# Altium PCB SFCmasterD.PcbDoc (part 5 of 7)
Units mm, origin at the board's own origin, x right, y up, seen from the top; angles counter-clockwise.
Board outline 152.4 x 101.6 mm, 2 copper layers (Top Layer, Bottom Layer); 249 components, 250 nets, 987 pads, 265 vias.
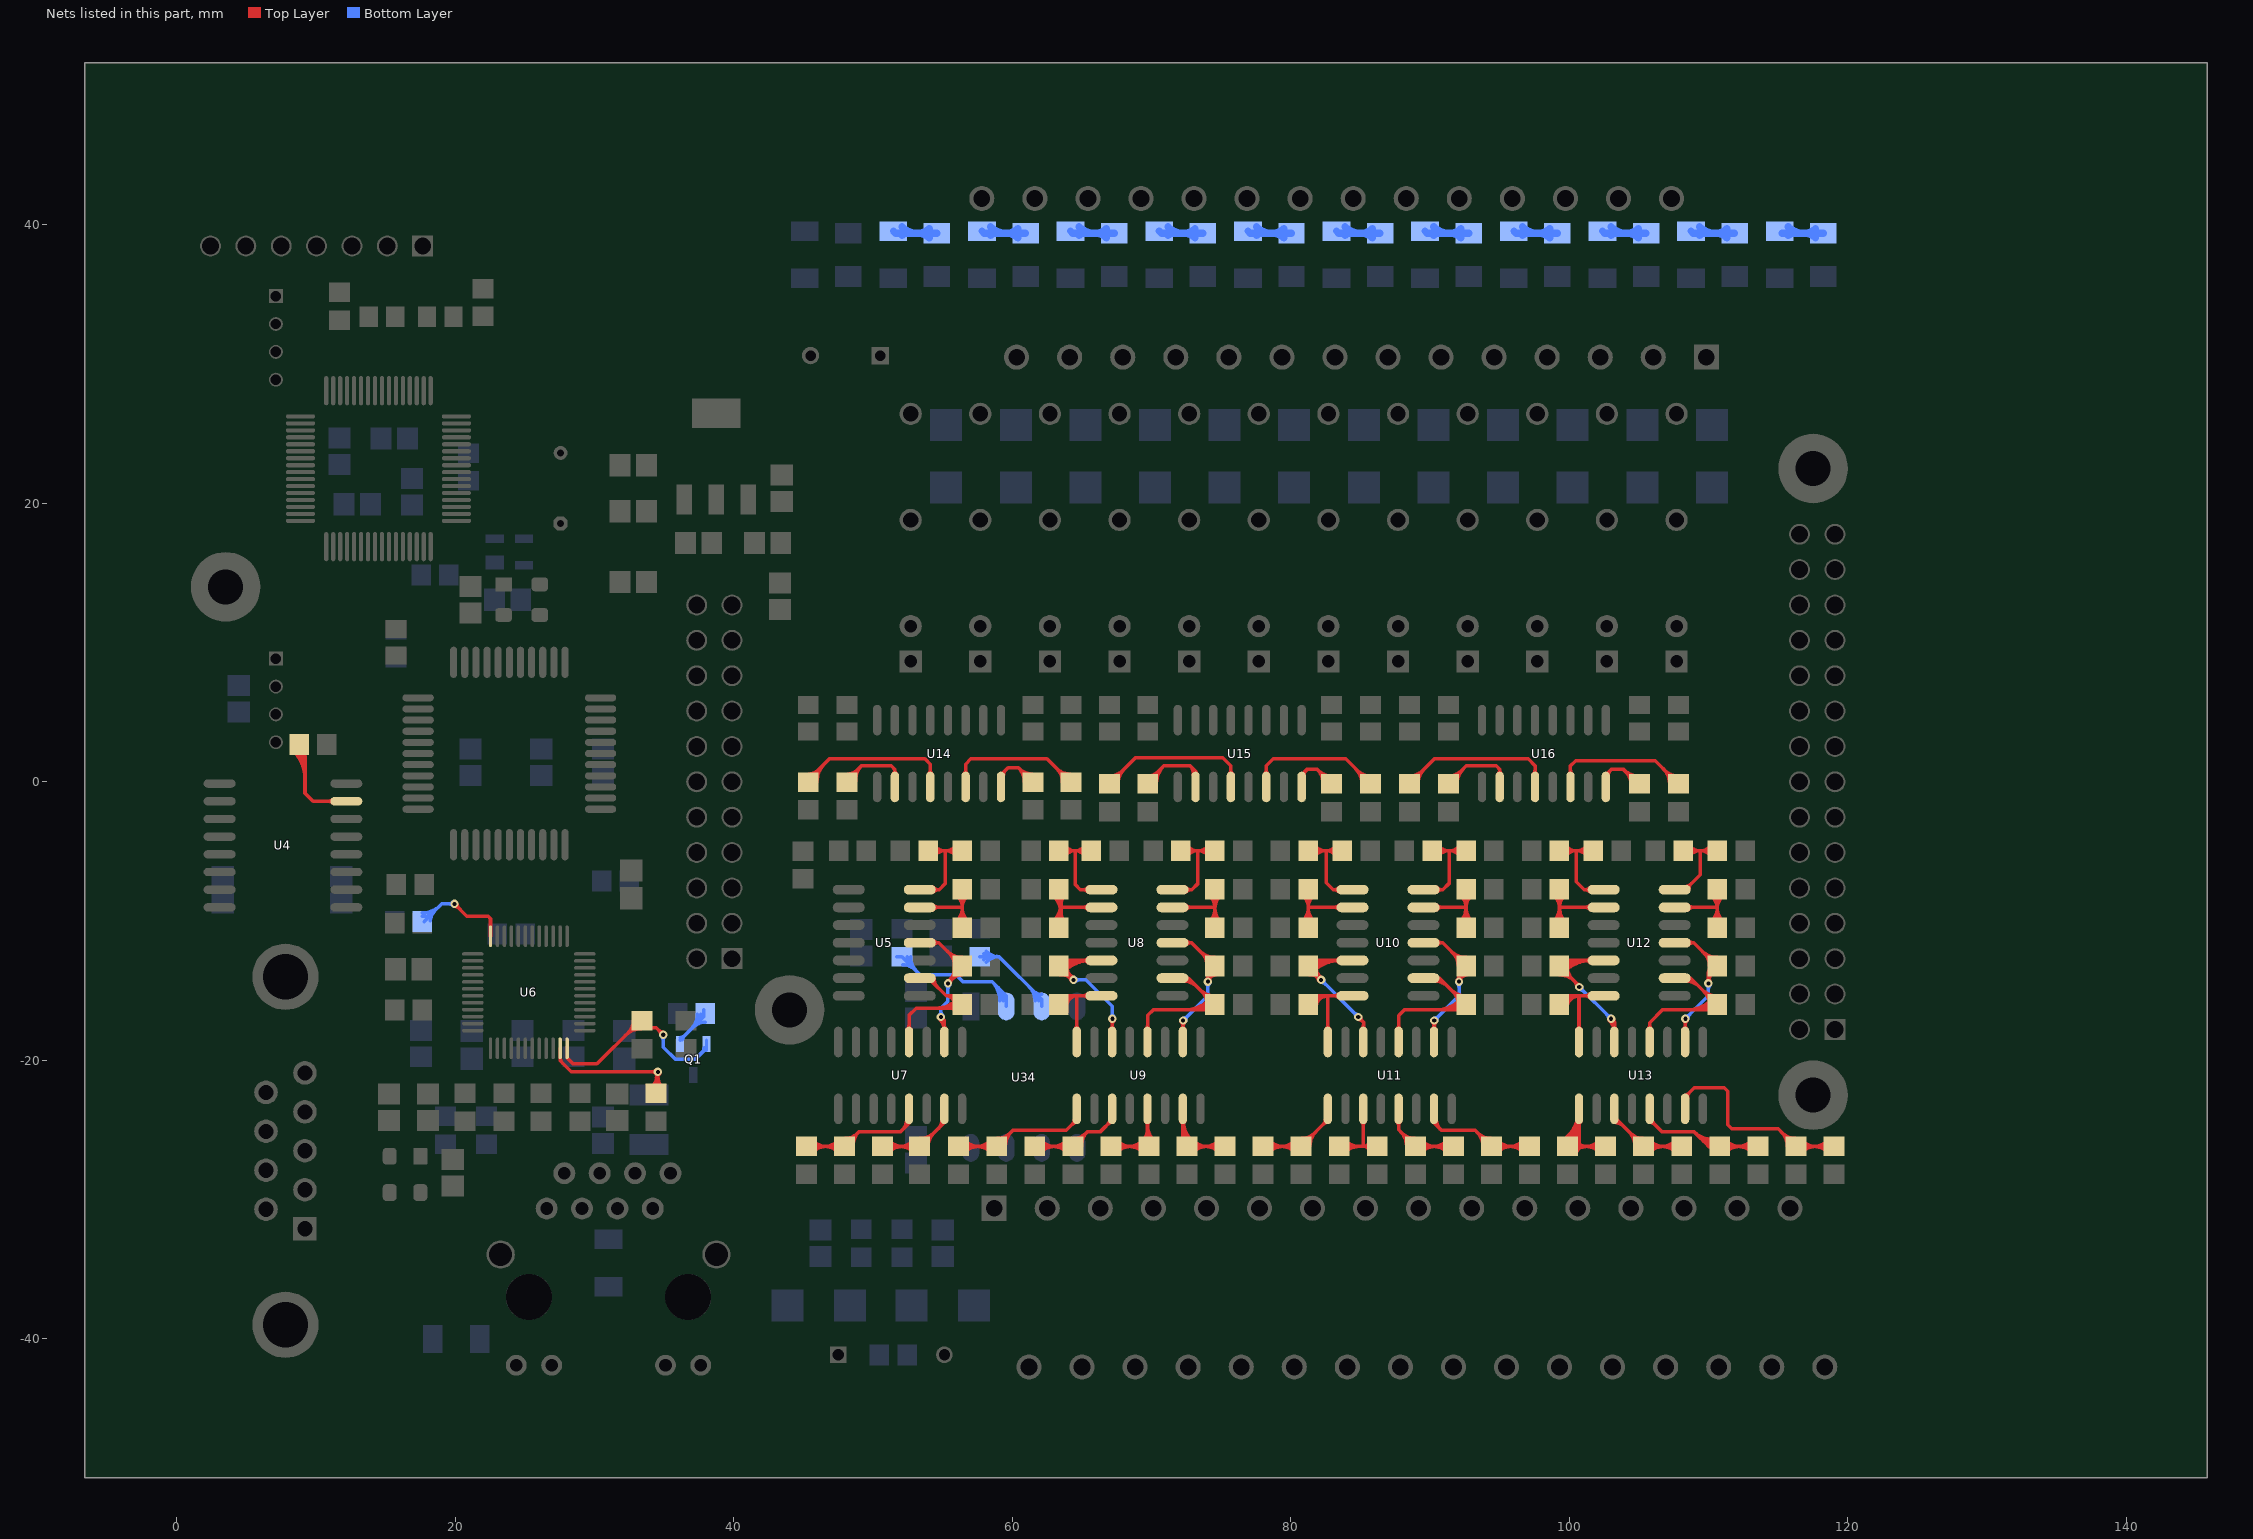
[diagram p5: the nets of this part, all layers, seen from the top]

## Via types
v1: diameter 0.6, hole 0.3, Top Layer to Bottom Layer, 265 vias

## Nets (pads, with @x,y where several pads share a name; then routed paths per layer and width w, separated by ;. In a path a pad name is that pad's centre, name@x,y a point inside that pad or via, vN(x,y) a via of type N, cw(c..) or ccw(c..) an arc to the next point about the centre after c; other vN are vias at no path point) (continued)
NetLR5_2: LR5.2 R113.1 | length 6.8
  Bottom Layer w0.508: LR5.2@51.45,39.546 51.6,39.396 R113.1@54.583,39.396 ; LR5.2@52.066,39.231 cw(c52.465,38.831) 52.465,39.396 ; LR5.2@52.066,39.861 ccw(c53.189,40.985) 53.189,39.396 ; R113.1@54.032,39.045 ccw(c53.186,38.199) 53.186,39.396 ccw(c53.186,40.593) R113.1@54.032,39.747
NetLR6_2: LR6.2 R119.1 | length 6.8
  Bottom Layer w0.508: LR6.2@57.816,39.546 57.966,39.396 R119.1@60.948,39.396 ; LR6.2@58.431,39.231 cw(c58.83,38.831) 58.83,39.396 ; LR6.2@58.431,39.861 ccw(c59.555,40.985) 59.555,39.396 ; R119.1@60.398,39.045 ccw(c59.551,38.199) 59.551,39.396 ccw(c59.551,40.593) R119.1@60.398,39.747
NetLR7_2: LR7.2 R125.1 | length 6.8
  Bottom Layer w0.508: LR7.2@64.181,39.546 64.331,39.396 R125.1@67.314,39.396 ; LR7.2@64.797,39.231 cw(c65.196,38.831) 65.196,39.396 ; LR7.2@64.797,39.861 ccw(c65.92,40.985) 65.92,39.396 ; R125.1@66.763,39.045 ccw(c65.916,38.199) 65.916,39.396 ccw(c65.916,40.593) R125.1@66.763,39.747
NetLR8_2: LR8.2 R131.1 | length 6.8
  Bottom Layer w0.508: LR8.2@70.547,39.546 70.697,39.396 R131.1@73.679,39.396 ; LR8.2@71.162,39.231 cw(c71.561,38.831) 71.561,39.396 ; LR8.2@71.162,39.861 ccw(c72.285,40.985) 72.285,39.396 ; R131.1@73.129,39.045 ccw(c72.282,38.199) 72.282,39.396 ccw(c72.282,40.593) R131.1@73.129,39.747
NetLR9_2: LR9.2 R137.1 | length 6.8
  Bottom Layer w0.508: LR9.2@76.912,39.546 77.062,39.396 R137.1@80.045,39.396 ; LR9.2@77.527,39.231 cw(c77.927,38.831) 77.927,39.396 ; LR9.2@77.527,39.861 ccw(c78.651,40.985) 78.651,39.396 ; R137.1@79.494,39.045 ccw(c78.647,38.199) 78.647,39.396 ccw(c78.647,40.593) R137.1@79.494,39.747
NetLR10_2: LR10.2 R143.1 | length 6.8
  Bottom Layer w0.508: LR10.2@83.277,39.546 83.427,39.396 R143.1@86.41,39.396 ; LR10.2@83.893,39.231 cw(c84.292,38.831) 84.292,39.396 ; LR10.2@83.893,39.861 ccw(c85.016,40.985) 85.016,39.396 ; R143.1@85.859,39.045 ccw(c85.013,38.199) 85.013,39.396 ccw(c85.013,40.593) R143.1@85.859,39.747
NetLR11_2: LR11.2 R149.1 | length 6.8
  Bottom Layer w0.508: LR11.2@89.643,39.546 89.793,39.396 R149.1@92.775,39.396 ; LR11.2@90.258,39.231 cw(c90.657,38.831) 90.657,39.396 ; LR11.2@90.258,39.861 ccw(c91.382,40.985) 91.382,39.396 ; R149.1@92.225,39.045 ccw(c91.378,38.199) 91.378,39.396 ccw(c91.378,40.593) R149.1@92.225,39.747
NetLR12_2: LR12.2 R155.1 | length 6.8
  Bottom Layer w0.508: LR12.2@96.008,39.546 96.158,39.396 R155.1@99.141,39.396 ; LR12.2@96.623,39.231 cw(c97.023,38.831) 97.023,39.396 ; LR12.2@96.623,39.861 ccw(c97.747,40.985) 97.747,39.396 ; R155.1@98.59,39.045 ccw(c97.743,38.199) 97.743,39.396 ccw(c97.743,40.593) R155.1@98.59,39.747
NetLR13_2: LR13.2 R161.1 | length 6.8
  Bottom Layer w0.508: LR13.2@102.373,39.546 102.523,39.396 R161.1@105.506,39.396 ; LR13.2@102.989,39.231 cw(c103.388,38.831) 103.388,39.396 ; LR13.2@102.989,39.861 ccw(c104.112,40.985) 104.112,39.396 ; R161.1@104.955,39.045 ccw(c104.109,38.199) 104.109,39.396 ccw(c104.109,40.593) R161.1@104.955,39.747
NetLR14_2: LR14.2 R167.1 | length 6.8
  Bottom Layer w0.508: LR14.2@108.739,39.546 108.889,39.396 R167.1@111.872,39.396 ; LR14.2@109.354,39.231 cw(c109.753,38.831) 109.753,39.396 ; LR14.2@109.354,39.861 ccw(c110.478,40.985) 110.478,39.396 ; R167.1@111.321,39.045 ccw(c110.474,38.199) 110.474,39.396 ccw(c110.474,40.593) R167.1@111.321,39.747
NetLR15_2: LR15.2 R173.1 | length 6.6
  Bottom Layer w0.508: LR15.2@115.254,39.396 R173.1@118.237,39.396 ; LR15.2@115.72,39.231 cw(c116.119,38.831) 116.119,39.396 ; LR15.2@115.72,39.861 ccw(c116.843,40.985) 116.843,39.396 ; R173.1@117.686,39.045 ccw(c116.84,38.199) 116.84,39.396 ccw(c116.84,40.593) R173.1@117.686,39.747
NetQ1_1: Q1.1 R106.2 | length 6.4
  Bottom Layer w0.25: Q1.1@36.134,-18.56 37.83,-16.864 R106.2@37.83,-16.383 ; Q1.1@36.134,-18.364 ccw(c36.134,-17.891) 36.469,-18.225 ; Q1.1@36.309,-18.539 cw(c36.681,-18.539) Q1.1@36.418,-18.276 ; 36.94,-17.754 ccw(c35.873,-16.687) R106.2@37.382,-16.687 ; 37.061,-17.633 cw(c37.957,-18.529) R106.2@37.957,-17.262 ; R106.2@37.367,-17.327 ccw(c36.727,-16.687) R106.2@37.632,-16.687
NetQ1_2: Q1.2 R100.2 U6.12 | length 19.3
  Top Layer w0.25: U6.12@28.023,-19.138 28.023,-19.83 28.444,-20.251 30.168,-20.251 32.766,-17.653 34.417,-17.653 v1(34.925,-18.161) ; 32.211,-18.208 cw(c33.351,-19.349) R100.2@33.351,-17.736 ; 32.435,-17.984 ccw(c31.612,-17.161) R100.2@32.776,-17.161 ; 32.637,-17.782 cw(c33.351,-18.495) R100.2@33.351,-17.486 ; v1@34.75,-18.161 ccw(c34.328,-18.161) 34.626,-17.862 ccw(c34.925,-17.564) v1@34.925,-17.986
  Bottom Layer w0.25: v1@34.801,-18.285 cw(c34.503,-18.583) 34.925,-18.583 cw(c35.347,-18.583) v1@35.049,-18.285 ; v1(34.925,-18.161) 34.925,-19.05 35.814,-19.939 37.211,-19.939 38.034,-19.116 Q1.2@38.034,-18.56 ; 37.716,-19.434 ccw(c37.371,-19.089) Q1.2@37.859,-19.089 ; Q1.2@37.781,-19.369 cw(c38.034,-19.621) Q1.2@38.034,-19.264
NetR6_2: R6.2 U4.7 | length 13.4
  Top Layer w0.254: R6.2@8.374,2.212 cw(c6.374,0.212) 9.202,0.212 ; R6.2@8.553,2.391 cw(c6.988,0.826) 9.202,0.826 ; R6.2@8.636,2.413 9.202,1.847 ; R6.2@8.733,2.571 cw(c7.601,1.439) 9.202,1.439 ; R6.2@8.779,2.044 cw(c8.779,1.498) 9.165,1.884 ; R6.2@9.196,2.224 ccw(c9.394,2.039) 9.202,1.847 ; U4.7@11.198,-1.519 ccw(c10.902,-1.815) 10.902,-1.397 ccw(c10.902,-0.979) U4.7@11.198,-1.275 ; U4.7@12.17,-1.397 9.779,-1.397 9.202,-0.82 9.202,1.847
NetR11_2: R11.2 U5.9 U7.12 | length 17.4
  Top Layer w0.254: U7.12@52.456,-17.76 ccw(c52.16,-17.464) 52.578,-17.464 ccw(c52.996,-17.464) U7.12@52.7,-17.76 ; U7.12@52.578,-18.682 52.578,-16.764 53.086,-16.256 56.15,-16.256 R11.2@56.404,-16.002 55.769,-15.367 55.245,-15.367 ; U5.9@53.35,-14.097 53.975,-14.097 55.245,-15.367 ; U5.9@54.373,-14.097 ccw(c55.334,-14.097) 54.654,-14.776 ; 54.528,-16.256 ccw(c54.528,-14.176) R11.2@55.999,-15.647 ; 55.141,-16.256 ccw(c55.141,-14.789) R11.2@56.178,-15.826 ; 55.499,-15.367 cw(c55.499,-15.953) R11.2@56.085,-15.952 ; 55.513,-16.256 cw(c55.513,-16.943) R11.2@55.999,-16.457 ; R11.2@55.753,-15.367 cw(c55.753,-15.953) R11.2@56.339,-15.952 ; R11.2@55.831,-15.952 ccw(c55.245,-15.953) 55.245,-15.367
NetR12_1: R12.1 R14.2 U5.14 | length 11.2
  Top Layer w0.254: U5.14@53.35,-7.747 54.737,-7.747 55.181,-7.302 55.181,-4.953 ; R12.1@53.959,-4.953 55.181,-4.953 ; U5.14@54.308,-7.905 cw(c54.688,-8.285) 54.688,-7.747 cw(c54.688,-7.209) U5.14@54.308,-7.589 ; R12.1@54.399,-5.32 cw(c55.181,-5.97) 55.181,-4.953 ; R12.1@54.399,-4.586 ccw(c55.181,-3.936) 55.181,-4.953 ; R14.2@55.964,-5.32 ccw(c55.182,-5.97) 55.182,-4.953 ; R14.2@55.964,-4.586 cw(c55.182,-3.936) 55.182,-4.953 ; R14.2@56.404,-4.953 55.181,-4.953
NetR13_1: R13.1 R22.2 U7.5 | length 19.4
  Top Layer w0.254: R22.2@45.212,-26.178 R13.1@47.945,-26.178 48.977,-25.146 ; R22.2@45.488,-26.404 cw(c46.032,-26.948) 46.032,-26.178 cw(c46.032,-25.408) R22.2@45.488,-25.952 ; R22.2@45.667,-26.583 cw(c46.645,-27.561) 46.645,-26.178 cw(c46.645,-24.795) R22.2@45.667,-25.773 ; R13.1@47.49,-26.583 ccw(c46.512,-27.561) 46.512,-26.178 ccw(c46.512,-24.795) R13.1@47.49,-25.773 ; R13.1@47.669,-26.404 ccw(c47.125,-26.948) 47.125,-26.178 ccw(c47.125,-25.408) R13.1@47.669,-25.952 ; R13.1@47.995,-25.605 ccw(c47.995,-24.342) 48.888,-25.235 ; R13.1@48.314,-26.171 cw(c49.143,-26.153) R13.1@48.556,-25.566 ; R13.1@48.568,-26.165 cw(c49.965,-26.134) 48.977,-25.146 ; 52.121,-24.968 ccw(c51.434,-24.282) U7.5@52.405,-24.282 ; U7.5@52.578,-23.482 52.578,-24.511 51.943,-25.146 48.977,-25.146
NetR16_2: R16.2 U6.11 | length 15.4
  Top Layer w0.25: U6.11@27.523,-19.788 ccw(c28.107,-19.788) 27.694,-20.201 ; U6.11@27.523,-19.138 27.523,-20.03 28.321,-20.828 v1(34.544,-20.828) ; R16.2@34.067,-21.955 ccw(c32.975,-20.828) v1(34.544,-20.828) ; R16.2@34.241,-22.135 ccw(c33.547,-21.419) 34.544,-21.419 ; v1@34.392,-20.916 cw(c34.026,-21.127) 34.435,-21.236 ; R16.2@34.417,-22.241 34.179,-22.241 34.544,-21.876 v1(34.544,-20.828) ; v1@34.42,-20.704 cw(c34.122,-20.406) 34.122,-20.828 cw(c34.122,-21.25) 34.42,-20.952 cw(c34.122,-21.25) 34.544,-21.25 cw(c34.966,-21.25) v1@34.668,-20.952 ; 34.435,-21.236 cw(c34.843,-21.345) v1@34.631,-20.98 ; 34.544,-21.166 ccw(c35.669,-21.166) R16.2@34.874,-21.961
NetR23_2: R23.2 U5.11 U7.10 | length 21.9
  Top Layer w0.254: U5.11@53.35,-11.557 54.721,-11.557 R23.2@56.404,-13.24 55.88,-13.764 55.88,-13.97 v1(55.372,-14.478) ccw(c54.261,-13.367) R23.2@55.831,-13.31 ; U5.11@54.308,-11.715 cw(c54.688,-12.095) 54.688,-11.557 cw(c54.688,-11.019) U5.11@54.308,-11.399 ; v1@54.742,-17.013 cw(c53.833,-17.922) U7.10@55.118,-17.922 ; v1(54.864,-16.891) 55.118,-17.145 ; v1@54.883,-17.063 cw(c54.915,-17.347) 55.118,-17.145 ; v1@54.921,-16.834 cw(c54.446,-17.309) 55.118,-17.309 ; U7.10@54.996,-17.76 ccw(c54.7,-17.464) 55.118,-17.464 ccw(c55.536,-17.464) U7.10@55.24,-17.76 ; v1@55.036,-16.91 ccw(c55.32,-16.942) 55.118,-17.145 ; U7.10@55.118,-18.682 55.118,-17.145 ; v1@55.327,-14.311 ccw(c55.219,-13.907) 55.581,-14.116 ccw(c55.942,-14.325) v1@55.539,-14.433 ; 55.34,-12.176 ccw(c56.404,-11.113) R23.2@56.404,-12.617 ; v1@55.372,-14.305 ccw(c55.372,-13.887) 55.667,-14.183 ccw(c55.963,-14.478) v1@55.545,-14.478 ; 55.461,-12.297 cw(c54.568,-13.19) R23.2@55.831,-13.19 ; 55.693,-14.157 cw(c56.404,-14.869) R23.2@56.404,-13.863 ; R23.2@55.774,-12.61 ccw(c56.404,-11.98) R23.2@56.404,-12.871 ; 55.785,-14.065 ccw(c55.057,-13.338) R23.2@56.085,-13.301
  Bottom Layer w0.254: v1@54.742,-16.769 ccw(c54.446,-16.473) 54.864,-16.473 ccw(c55.282,-16.473) v1@54.986,-16.769 ; v1(54.864,-16.891) 54.864,-16.256 55.372,-15.748 v1(55.372,-14.478) ; v1@55.25,-14.6 cw(c54.954,-14.896) 55.372,-14.896 cw(c55.79,-14.896) v1@55.494,-14.6
NetR24_1: R24.1 R26.1 U5.13 | length 11.9
  Top Layer w0.254: U5.13@53.35,-9.017 56.404,-9.017 ; U5.13@54.308,-9.175 cw(c54.688,-9.555) 54.688,-9.017 cw(c54.688,-8.479) U5.13@54.308,-8.859 ; R24.1@55.999,-10.022 ccw(c55.021,-9.044) 56.404,-9.044 ccw(c57.787,-9.044) R24.1@56.809,-10.022 ; R26.1@56.03,-8.199 cw(c55.323,-9.017) 56.404,-9.017 ; R24.1@56.178,-10.202 ccw(c55.634,-9.657) 56.404,-9.657 ccw(c57.174,-9.657) R24.1@56.63,-10.202 ; R24.1@56.404,-10.477 56.404,-9.017 ; R26.1@56.404,-7.715 56.404,-9.017 ; R26.1@56.778,-8.199 ccw(c57.485,-9.017) 56.404,-9.017
NetR25_1: R25.1 R27.2 U7.7 | length 17
  Top Layer w0.254: R27.2@50.678,-26.178 53.411,-26.178 55.118,-24.471 U7.7@55.118,-23.482 ; R27.2@50.953,-26.404 cw(c51.498,-26.948) 51.498,-26.178 cw(c51.498,-25.408) R27.2@50.953,-25.952 ; R27.2@51.133,-26.583 cw(c52.111,-27.561) 52.111,-26.178 cw(c52.111,-24.795) R27.2@51.133,-25.773 ; R25.1@52.885,-26.583 ccw(c51.907,-27.561) 51.907,-26.178 ccw(c51.907,-24.795) R25.1@52.885,-25.773 ; R25.1@53.064,-26.404 ccw(c52.52,-26.948) 52.52,-26.178 ccw(c52.52,-25.408) R25.1@53.064,-25.952 ; R25.1@53.39,-25.859 ccw(c53.39,-25.039) R25.1@53.97,-25.619 ; R25.1@53.39,-25.605 ccw(c53.39,-24.172) 54.403,-25.185 ; R25.1@53.709,-26.178 cw(c54.43,-26.178) R25.1@53.92,-25.669 ; R25.1@53.963,-26.178 cw(c55.297,-26.178) 54.354,-25.235 ; 54.689,-24.899 ccw(c54.072,-24.282) U7.7@54.945,-24.282
NetR28_2: R28.2 U8.7 U9.16 | length 12.3
  Top Layer w0.254: R28.2@63.153,-15.93 cw(c63.786,-16.004) R28.2@63.786,-15.367 ; R28.2@63.214,-16.002 63.849,-15.367 64.643,-15.367 ; R28.2@63.406,-15.96 cw(c64.072,-16.038) 64.072,-15.367 ; R28.2@63.658,-15.989 cw(c64.357,-16.071) 64.357,-15.367 ; R28.2@63.91,-16.019 cw(c64.643,-16.105) 64.643,-15.367 ; U9.16@64.5,-17.76 ccw(c64.205,-17.464) 64.623,-17.464 ccw(c65.04,-17.464) U9.16@64.745,-17.76 ; U9.16@64.623,-18.682 64.623,-15.387 64.643,-15.367 ; U8.7@65.437,-15.525 ccw(c65.057,-15.905) 65.057,-15.367 ccw(c65.057,-14.829) U8.7@65.437,-15.209 ; U8.7@66.395,-15.367 64.643,-15.367
NetR29_1: R29.1 R31.2 U8.1 | length 10.9
  Top Layer w0.254: R29.1@63.341,-4.953 64.5,-4.953 ; R29.1@63.796,-5.301 cw(c64.5,-5.839) 64.5,-4.953 ; R29.1@63.796,-4.605 ccw(c64.5,-4.067) 64.5,-4.953 ; R31.2@65.204,-5.301 ccw(c64.5,-5.839) 64.5,-4.953 ; R31.2@65.204,-4.605 cw(c64.5,-4.067) 64.5,-4.953 ; U8.1@65.437,-7.905 ccw(c65.057,-8.285) 65.057,-7.747 ccw(c65.057,-7.209) U8.1@65.437,-7.589 ; R31.2@65.659,-4.953 64.5,-4.953 ; U8.1@66.395,-7.747 64.881,-7.747 64.5,-7.366 64.5,-4.953
NetR30_1: R30.1 R32.2 U9.1 | length 20.4
  Top Layer w0.254: R32.2@56.143,-26.178 R30.1@58.876,-26.178 60.035,-25.019 63.881,-25.019 64.623,-24.277 U9.1@64.623,-23.482 ; R32.2@56.419,-26.404 cw(c56.964,-26.948) 56.964,-26.178 cw(c56.964,-25.408) R32.2@56.419,-25.952 ; R32.2@56.599,-26.583 cw(c57.577,-27.561) 57.577,-26.178 cw(c57.577,-24.795) R32.2@56.599,-25.773 ; R30.1@58.421,-26.583 ccw(c57.443,-27.561) 57.443,-26.178 ccw(c57.443,-24.795) R30.1@58.421,-25.773 ; R30.1@58.601,-26.404 ccw(c58.056,-26.948) 58.056,-26.178 ccw(c58.056,-25.408) R30.1@58.601,-25.952 ; R30.1@58.926,-25.605 ccw(c58.926,-24.342) 59.819,-25.235 ; R30.1@59.245,-26.178 cw(c60.136,-26.178) R30.1@59.506,-25.548 ; R30.1@59.499,-26.178 cw(c61.003,-26.178) 59.94,-25.114 ; 64.319,-24.581 cw(c64.623,-24.884) U9.1@64.623,-24.455 ; 64.33,-24.57 ccw(c64.043,-24.282) U9.1@64.45,-24.282
NetR33_2: R33.2 U8.5 U9.14 | length 23.5
  Top Layer w0.254: R33.2@63.369,-13.608 cw(c63.438,-14.404) R33.2@64.004,-13.839 ; R33.2@63.387,-13.236 cw(c64.374,-14.222) 64.374,-12.827 ; R33.2@63.391,-13.861 cw(c63.5,-15.113) v1(64.389,-14.224) 63.373,-13.208 63.373,-13.081 63.627,-12.827 U8.5@66.395,-12.827 ; R33.2@63.567,-13.415 cw(c64.987,-14.836) 64.987,-12.827 ; R33.2@63.746,-13.595 cw(c65.6,-15.449) U8.5@65.6,-12.827 ; R33.2@63.914,-13.29 ccw(c65.023,-13.29) v1@64.239,-14.074 ; 64.066,-13.775 ccw(c64.59,-13.472) v1@64.434,-14.057 ; v1@64.216,-14.224 ccw(c63.798,-14.224) 64.094,-13.929 ccw(c64.389,-13.633) v1@64.389,-14.051 ; v1@64.222,-14.269 ccw(c63.818,-14.377) 64.027,-14.015 ccw(c64.236,-13.654) v1@64.344,-14.057 ; U8.5@65.437,-12.985 ccw(c65.057,-13.365) 65.057,-12.827 ccw(c65.057,-12.289) U8.5@65.437,-12.669 ; U9.14@67.04,-17.76 ccw(c66.695,-17.415) 67.183,-17.415 ; v1@67.061,-17.14 cw(c66.765,-17.436) 67.183,-17.436 cw(c67.601,-17.436) v1@67.305,-17.14 ; U9.14@67.163,-18.682 67.183,-18.662 v1(67.183,-17.018) ; 67.183,-17.514 ccw(c67.531,-17.514) U9.14@67.285,-17.76
  Bottom Layer w0.254: v1(64.389,-14.224) 65.278,-14.224 67.183,-16.129 v1(67.183,-17.018) ; v1@64.511,-14.346 cw(c64.807,-14.642) 64.807,-14.224 cw(c64.807,-13.806) v1@64.511,-14.102 ; v1@67.061,-16.896 ccw(c66.765,-16.6) 67.183,-16.6 ccw(c67.601,-16.6) v1@67.305,-16.896
NetR34_1: R34.1 R36.1 U8.2 | length 13
  Top Layer w0.254: R36.1@62.936,-10.022 ccw(c61.574,-8.66) 63.5,-8.66 ; R34.1@62.936,-8.17 cw(c61.574,-9.532) 63.5,-9.532 ; R36.1@63.115,-10.202 ccw(c62.187,-9.274) 63.5,-9.274 ; R34.1@63.115,-7.991 cw(c62.187,-8.919) 63.5,-8.919 ; R36.1@63.341,-10.477 63.5,-10.319 63.5,-7.874 R34.1@63.341,-7.715 ; 63.5,-9.428 ccw(c64.34,-9.428) R36.1@63.746,-10.022 ; 63.5,-9.017 U8.2@66.395,-9.017 ; 63.5,-8.765 cw(c64.34,-8.765) R34.1@63.746,-8.17 ; U8.2@65.437,-9.175 ccw(c65.057,-9.555) 65.057,-9.017 ccw(c65.057,-8.479) U8.2@65.437,-8.859
NetR35_1: R35.1 R37.2 U9.3 | length 17.3
  Top Layer w0.254: R37.2@61.609,-26.178 R35.1@64.342,-26.178 65.374,-25.146 66.294,-25.146 67.163,-24.277 U9.3@67.163,-23.482 ; R37.2@61.885,-26.404 cw(c62.429,-26.948) 62.429,-26.178 cw(c62.429,-25.408) R37.2@61.885,-25.952 ; R37.2@62.064,-26.583 cw(c63.042,-27.561) 63.042,-26.178 cw(c63.042,-24.795) R37.2@62.064,-25.773 ; R35.1@63.887,-26.583 ccw(c62.909,-27.561) 62.909,-26.178 ccw(c62.909,-24.795) R35.1@63.887,-25.773 ; R35.1@64.066,-26.404 ccw(c63.522,-26.948) 63.522,-26.178 ccw(c63.522,-25.408) R35.1@64.066,-25.952 ; R35.1@64.392,-25.605 ccw(c64.392,-24.342) 65.285,-25.235 ; R35.1@64.711,-26.171 cw(c65.54,-26.153) R35.1@64.953,-25.566 ; R35.1@64.965,-26.165 cw(c66.362,-26.134) 65.374,-25.146 ; 66.859,-24.581 cw(c67.163,-24.884) U9.3@67.163,-24.455 ; 66.87,-24.57 ccw(c66.583,-24.282) U9.3@66.99,-24.282
NetR38_2: R38.2 U8.9 U9.12 | length 20.6
  Top Layer w0.254: U9.12@69.58,-17.76 ccw(c69.235,-17.415) 69.723,-17.415 ; U9.12@69.703,-18.682 69.723,-18.662 69.723,-16.764 70.104,-16.383 74.168,-16.383 R38.2@74.549,-16.002 72.644,-14.097 U8.9@71.495,-14.097 ; 69.723,-17.514 ccw(c70.071,-17.514) U9.12@69.825,-17.76 ; U8.9@72.295,-14.32 cw(c72.295,-15.701) 73.271,-14.724 ; U8.9@72.295,-14.066 cw(c72.295,-14.834) 72.838,-14.291 ; 72.367,-16.383 ccw(c72.367,-13.87) R38.2@74.144,-15.647 ; 72.98,-16.383 ccw(c72.98,-14.483) R38.2@74.323,-15.826 ; 73.485,-14.938 ccw(c74.549,-13.875) R38.2@74.549,-15.379 ; 73.593,-16.383 ccw(c73.593,-15.096) R38.2@74.503,-16.006 ; 73.606,-15.059 cw(c72.713,-15.952) R38.2@73.976,-15.952 ; R38.2@73.919,-15.372 ccw(c74.549,-14.742) R38.2@74.549,-15.633
NetR39_1: R39.1 R41.2 U8.14 | length 11.2
  Top Layer w0.254: U8.14@71.495,-7.747 72.882,-7.747 73.327,-7.302 73.327,-4.953 ; R39.1@72.104,-4.953 73.327,-4.953 ; U8.14@72.453,-7.905 cw(c72.833,-8.285) 72.833,-7.747 cw(c72.833,-7.209) U8.14@72.453,-7.589 ; R39.1@72.544,-5.32 cw(c73.326,-5.97) 73.326,-4.953 ; R39.1@72.544,-4.586 ccw(c73.326,-3.936) 73.326,-4.953 ; R41.2@74.109,-5.32 ccw(c73.327,-5.97) 73.327,-4.953 ; R41.2@74.109,-4.586 cw(c73.327,-3.936) 73.327,-4.953 ; R41.2@74.549,-4.953 73.327,-4.953
NetR40_1: R40.1 R42.2 U9.5 | length 15.8
  Top Layer w0.254: R42.2@67.075,-26.178 R40.1@69.808,-26.178 69.703,-26.073 U9.5@69.703,-23.482 ; R42.2@67.35,-26.404 cw(c67.895,-26.948) 67.895,-26.178 cw(c67.895,-25.408) R42.2@67.35,-25.952 ; R42.2@67.53,-26.583 cw(c68.508,-27.561) 68.508,-26.178 cw(c68.508,-24.795) R42.2@67.53,-25.773 ; R40.1@69.352,-26.583 ccw(c68.374,-27.561) 68.374,-26.178 ccw(c68.374,-24.795) 69.352,-25.773 ccw(c68.507,-24.928) 69.703,-24.928 ; R40.1@69.532,-26.404 ccw(c68.988,-26.948) 68.988,-26.178 ccw(c68.988,-25.408) R40.1@69.532,-25.952 ; U9.5@69.58,-24.404 cw(c69.285,-24.7) 69.703,-24.7 cw(c70.12,-24.7) U9.5@69.825,-24.404 ; 69.703,-25.275 ccw(c70.661,-25.275) R40.1@69.983,-25.952 ; 69.703,-24.662 ccw(c71.274,-24.662) R40.1@70.163,-25.773
NetR43_2: R43.2 U8.11 U9.10 | length 20.5
  Top Layer w0.254: U8.11@71.495,-11.557 72.866,-11.557 R43.2@74.549,-13.24 74.041,-13.748 v1(74.041,-14.351) ; U9.10@72.12,-17.76 ccw(c71.775,-17.415) v1@72.263,-17.415 ; v1@72.141,-17.267 cw(c71.845,-17.563) 72.263,-17.563 cw(c72.681,-17.563) v1@72.385,-17.267 ; v1@72.148,-17.275 cw(c71.973,-17.473) 72.229,-17.542 ; U9.10@72.243,-18.682 72.263,-18.662 v1(72.263,-17.145) ; 72.263,-17.514 ccw(c72.611,-17.514) U9.10@72.365,-17.76 ; U8.11@72.453,-11.715 cw(c72.833,-12.095) 72.833,-11.557 cw(c72.833,-11.019) U8.11@72.453,-11.399 ; 73.485,-12.176 ccw(c74.549,-11.113) R43.2@74.549,-12.617 ; 73.606,-12.297 cw(c72.713,-13.19) R43.2@73.976,-13.19 ; v1@73.919,-14.229 ccw(c73.623,-13.933) 74.041,-13.933 ccw(c74.459,-13.933) v1@74.163,-14.229 ; R43.2@73.919,-12.61 ccw(c74.549,-11.98) R43.2@74.549,-12.871 ; v1@73.955,-14.201 ccw(c73.817,-13.963) 74.083,-14.034 ; v1@74.041,-14.466 cw(c74.649,-14.466) R43.2@74.597,-13.861 ; v1@74.041,-14.19 cw(c74.625,-14.19) R43.2@74.576,-13.608 ; R43.2@74.041,-13.913 cw(c74.602,-13.913) R43.2@74.554,-13.355 ; R43.2@74.101,-13.967 ccw(c74.372,-14.04) v1@74.167,-14.233
  Bottom Layer w0.254: v1(72.263,-17.145) 74.041,-15.367 v1(74.041,-14.351) ; v1@72.263,-16.972 ccw(c72.263,-16.554) 72.558,-16.85 ccw(c72.854,-17.145) v1@72.436,-17.145 ; v1@73.919,-14.473 cw(c73.623,-14.769) 74.041,-14.769 cw(c74.459,-14.769) v1@74.163,-14.473
NetR44_1: R44.1 R46.1 U8.13 | length 13.1
  Top Layer w0.254: U8.13@71.495,-9.017 74.47,-9.017 74.549,-9.096 ; U8.13@72.453,-9.175 cw(c72.833,-9.555) 72.833,-9.017 cw(c72.833,-8.479) U8.13@72.453,-8.859 ; R44.1@74.155,-10.011 ccw(c73.289,-9.096) 74.549,-9.096 ; R46.1@74.155,-8.181 cw(c73.289,-9.096) 74.549,-9.096 ; R44.1@74.33,-10.196 ccw(c73.848,-9.686) 74.549,-9.686 ccw(c75.25,-9.686) R44.1@74.768,-10.196 ; R46.1@74.33,-7.997 cw(c73.848,-8.506) 74.549,-8.506 cw(c75.25,-8.506) R46.1@74.768,-7.997 ; R44.1@74.549,-10.477 74.549,-9.096 ; R46.1@74.549,-7.715 74.549,-9.096 ; R44.1@74.943,-10.011 cw(c75.809,-9.096) 74.549,-9.096 ; R46.1@74.943,-8.181 ccw(c75.809,-9.096) 74.549,-9.096
NetR45_1: R45.1 R47.2 U9.7 | length 17.2
  Top Layer w0.254: R47.2@72.085,-25.773 ccw(c71.706,-25.393) 72.243,-25.393 ; U9.7@72.12,-24.404 cw(c71.825,-24.7) 72.243,-24.7 cw(c72.66,-24.7) U9.7@72.365,-24.404 ; 72.243,-25.422 ccw(c73.246,-25.422) R47.2@72.536,-26.132 ; 72.243,-24.809 ccw(c73.859,-24.809) R47.2@72.716,-25.952 ; U9.7@72.243,-24.196 ccw(c74.473,-24.196) R47.2@72.896,-25.773 ; U9.7@72.243,-23.482 72.243,-25.88 R47.2@72.54,-26.178 R45.1@75.273,-26.178 ; R47.2@72.816,-26.404 cw(c73.361,-26.948) 73.361,-26.178 cw(c73.361,-25.408) R47.2@72.816,-25.952 ; R47.2@72.996,-26.583 cw(c73.974,-27.561) 73.974,-26.178 cw(c73.974,-24.795) R47.2@72.996,-25.773 ; R45.1@74.818,-26.583 ccw(c73.84,-27.561) 73.84,-26.178 ccw(c73.84,-24.795) R45.1@74.818,-25.773 ; R45.1@74.998,-26.404 ccw(c74.453,-26.948) 74.453,-26.178 ccw(c74.453,-25.408) R45.1@74.998,-25.952
NetR48_2: R48.2 U10.7 U11.16 | length 11.6
  Top Layer w0.254: R48.2@81.248,-16.002 81.883,-15.367 82.677,-15.367 ; R48.2@81.312,-15.965 cw(c82.05,-16.122) 82.05,-15.367 ; R48.2@81.56,-16.018 cw(c82.364,-16.188) 82.364,-15.367 ; R48.2@81.809,-16.071 cw(c82.677,-16.255) 82.677,-15.367 ; U11.16@82.534,-17.76 ccw(c82.239,-17.464) 82.657,-17.464 ccw(c83.074,-17.464) U11.16@82.779,-17.76 ; U11.16@82.657,-18.682 82.657,-15.387 82.677,-15.367 ; U10.7@83.471,-15.525 ccw(c83.091,-15.905) 83.091,-15.367 ccw(c83.091,-14.829) U10.7@83.471,-15.209 ; U10.7@84.429,-15.367 82.677,-15.367
NetR49_1: R49.1 R51.2 U10.1 | length 12.3
  Top Layer w0.254: R49.1@81.248,-4.953 82.534,-4.953 ; R49.1@81.485,-5.166 cw(c81.964,-5.597) 81.964,-4.953 cw(c81.964,-4.309) R49.1@81.485,-4.74 ; R49.1@81.674,-5.336 cw(c82.534,-6.109) 82.534,-4.953 ; R49.1@81.674,-4.57 ccw(c82.534,-3.797) 82.534,-4.953 ; R51.2@83.238,-5.301 ccw(c82.534,-5.839) 82.534,-4.953 ; R51.2@83.238,-4.605 cw(c82.534,-4.067) 82.534,-4.953 ; U10.1@83.471,-7.905 ccw(c83.091,-8.285) 83.091,-7.747 ccw(c83.091,-7.209) U10.1@83.471,-7.589 ; R51.2@83.693,-4.953 82.534,-4.953 ; U10.1@84.429,-7.747 83.042,-7.747 82.534,-7.239 82.534,-4.953
NetR50_1: R50.1 R52.2 U11.1 | length 16.5
  Top Layer w0.254: R52.2@78.006,-26.178 R50.1@80.739,-26.178 82.657,-24.261 U11.1@82.657,-23.482 ; R52.2@78.282,-26.404 cw(c78.826,-26.948) 78.826,-26.178 cw(c78.826,-25.408) R52.2@78.282,-25.952 ; R52.2@78.461,-26.583 cw(c79.44,-27.561) 79.44,-26.178 cw(c79.44,-24.795) R52.2@78.461,-25.773 ; R50.1@80.284,-26.583 ccw(c79.306,-27.561) 79.306,-26.178 ccw(c79.306,-24.795) R50.1@80.284,-25.773 ; R50.1@80.463,-26.404 ccw(c79.919,-26.948) 79.919,-26.178 ccw(c79.919,-25.408) R50.1@80.463,-25.952 ; R50.1@80.789,-25.605 ccw(c80.789,-24.342) 81.682,-25.235 ; R50.1@81.108,-26.178 cw(c81.999,-26.178) R50.1@81.369,-25.548 ; R50.1@81.362,-26.178 cw(c82.866,-26.178) 81.803,-25.114 ; 82.325,-24.593 cw(c82.657,-24.924) U11.1@82.657,-24.455 ; 82.376,-24.541 ccw(c82.118,-24.282) U11.1@82.484,-24.282
NetR53_2: R53.2 U10.5 U11.14 | length 22.9
  Top Layer w0.254: R53.2@81.283,-13.607 cw(c81.352,-14.23) R53.2@81.795,-13.787 ; R53.2@81.294,-13.236 cw(c82.281,-14.222) 82.281,-12.827 ; R53.2@81.311,-13.859 cw(c81.426,-14.904) v1@82.169,-14.161 ; R53.2@81.474,-13.415 cw(c82.894,-14.836) 82.894,-12.827 ; R53.2@81.653,-13.595 cw(c83.507,-15.449) U10.5@83.507,-12.827 ; R53.2@81.72,-13.902 cw(c81.418,-14.425) v1@82.002,-14.269 ; R53.2@81.821,-13.3 ccw(c83.01,-13.32) v1@82.169,-14.161 ; R53.2@81.829,-13.821 cw(c81.426,-14.224) v1@81.996,-14.224 ; 81.949,-13.78 cw(c81.494,-14.043) v1@82.002,-14.179 ; 81.982,-13.973 ccw(c82.169,-13.786) v1@82.169,-14.051 ; 82.026,-13.913 ccw(c82.294,-13.758) v1@82.214,-14.057 ; v1(82.169,-14.224) v1@82.169,-14.161 ; U10.5@83.471,-12.985 ccw(c83.091,-13.365) 83.091,-12.827 ccw(c83.091,-12.289) U10.5@83.471,-12.669 ; U10.5@84.429,-12.827 81.661,-12.827 R53.2@81.248,-13.24 v1@82.169,-14.161 ; v1@84.836,-17.064 cw(c84.836,-17.482) 85.131,-17.186 cw(c85.427,-16.891) v1@85.009,-16.891 ; v1(84.836,-16.891) 85.217,-17.272 85.217,-18.662 U11.14@85.197,-18.682 ; U11.14@85.074,-17.76 ccw(c84.729,-17.415) 85.217,-17.415 ; 85.217,-17.514 ccw(c85.565,-17.514) U11.14@85.319,-17.76
  Bottom Layer w0.254: v1@82.169,-14.397 cw(c82.169,-14.815) 82.464,-14.519 cw(c82.76,-14.224) v1@82.342,-14.224 ; v1(82.169,-14.224) v1(84.836,-16.891) ; v1@84.663,-16.891 ccw(c84.245,-16.891) 84.541,-16.596 ccw(c84.836,-16.3) v1@84.836,-16.718
NetR54_1: R54.1 R68.1 U10.2 | length 12
  Top Layer w0.254: R68.1@80.843,-10.022 ccw(c79.865,-9.044) 81.248,-9.044 ccw(c82.631,-9.044) R68.1@81.653,-10.022 ; R54.1@80.874,-8.199 cw(c80.167,-9.017) 81.248,-9.017 ; R68.1@81.022,-10.202 ccw(c80.478,-9.657) 81.248,-9.657 ccw(c82.018,-9.657) R68.1@81.474,-10.202 ; R68.1@81.248,-10.477 81.248,-9.017 ; R54.1@81.248,-7.715 81.248,-9.017 ; R54.1@81.622,-8.199 ccw(c82.329,-9.017) 81.248,-9.017 ; U10.2@83.471,-9.175 ccw(c83.091,-9.555) 83.091,-9.017 ccw(c83.091,-8.479) U10.2@83.471,-8.859 ; U10.2@84.429,-9.017 81.248,-9.017
NetR55_1: R55.1 R69.2 U11.3 | length 10.5
  Top Layer w0.254: R69.2@83.472,-26.178 85.217,-26.178 ; R69.2@83.747,-26.404 cw(c84.292,-26.948) 84.292,-26.178 cw(c84.292,-25.408) R69.2@83.747,-25.952 ; R69.2@83.927,-26.583 cw(c84.905,-27.561) 84.905,-26.178 cw(c84.905,-24.795) R69.2@83.927,-25.773 ; U11.3@85.074,-24.404 cw(c84.779,-24.7) 85.197,-24.7 cw(c85.614,-24.7) U11.3@85.319,-24.404 ; U11.3@85.197,-23.482 85.197,-26.158 85.217,-26.178 ; R55.1@85.645,-26.439 ccw(c85.217,-26.659) 85.217,-26.178 ; R55.1@85.645,-25.917 cw(c85.217,-25.697) 85.217,-26.178 ; R55.1@86.205,-26.178 85.217,-26.178
NetR56_2: R56.2 U14.2 | length 8.8
  Top Layer w0.254: R56.2@48.133,-0.016 48.133,0.127 49.149,1.143 ; R56.2@48.183,0.557 ccw(c48.183,1.474) 48.832,0.826 ; R56.2@48.501,0.015 cw(c49.426,0.105) 48.769,0.763 ; R56.2@48.753,0.039 cw(c50.12,0.172) 49.149,1.143 ; U14.2@51.44,0.554 ccw(c51.144,0.85) 51.562,0.85 ccw(c51.98,0.85) U14.2@51.684,0.554 ; U14.2@51.562,-0.368 51.562,0.889 51.308,1.143 49.149,1.143
NetR57_2: R57.2 U14.4 | length 15.1
  Top Layer w0.254: R57.2@45.339,-0.016 45.339,0.127 46.863,1.651 53.721,1.651 54.102,1.27 U14.4@54.102,-0.368 ; R57.2@45.389,0.557 ccw(c45.389,1.474) 46.038,0.826 ; R57.2@45.708,-0.016 cw(c46.944,-0.016) 46.07,0.858 ; R57.2@45.962,-0.016 cw(c47.811,-0.016) 46.504,1.292 ; U14.4@53.98,0.554 ccw(c53.684,0.85) 54.102,0.85 ccw(c54.52,0.85) U14.4@54.224,0.554
NetR58_2: R58.2 U14.6 | length 14.1
  Top Layer w0.254: U14.6@56.52,0.554 ccw(c56.224,0.85) 56.642,0.85 ccw(c57.06,0.85) U14.6@56.764,0.554 ; U14.6@56.642,-0.368 56.642,1.27 57.023,1.651 62.484,1.651 64.151,-0.016 R58.2@64.22,-0.016 ; 63.16,0.975 ccw(c64.17,1.985) R58.2@64.17,0.557 ; 63.205,0.93 cw(c62.258,-0.016) R58.2@63.597,-0.016 ; R58.2@63.593,0.542 ccw(c64.17,1.118) R58.2@64.17,0.303 ; R58.2@63.638,0.497 cw(c63.126,-0.016) R58.2@63.851,-0.016
NetR59_2: R59.2 U14.8 | length 7.1
  Top Layer w0.254: U14.8@59.182,-0.368 59.182,0.508 59.69,1.016 60.436,1.016 ; U14.8@59.355,0.432 cw(c59.956,0.432) 59.531,0.857 ; 60.525,0.927 ccw(c61.418,1.82) R59.2@61.418,0.557 ; R59.2@60.845,-0.003 ccw(c59.448,0.028) 60.436,1.016 ; R59.2@60.856,0.596 cw(c60.27,0.009) R59.2@61.099,-0.009 ; R59.2@61.468,-0.016 60.436,1.016
NetR60_2: R60.2 U15.2 | length 10
  Top Layer w0.254: R60.2@69.723,-0.143 69.723,0 70.866,1.143 ; R60.2@69.773,0.43 ccw(c69.773,1.347) 70.422,0.699 ; R60.2@70.092,-0.139 cw(c71.281,-0.124) 70.44,0.717 ; R60.2@70.346,-0.136 cw(c72.122,-0.113) 70.866,1.143 ; U15.2@72.982,0.464 ccw(c72.231,0.603) 72.771,1.143 ; U15.2@73.054,0.574 ccw(c72.924,0.762) 73.152,0.762 ; 73.112,0.802 cw(c72.807,0.496) U15.2@73.232,0.417 ; U15.2@73.152,-0.368 73.152,0.762 ; U15.2@73.25,0.574 cw(c73.38,0.762) 73.152,0.762 ; 70.866,1.143 72.771,1.143 ; 72.771,1.143 73.152,0.762
NetR61_2: R61.2 U15.4 | length 14.8
  Top Layer w0.254: R61.2@66.971,-0.143 68.838,1.724 75.111,1.724 75.692,1.143 U15.4@75.692,-0.368 ; R61.2@67.021,0.43 ccw(c67.021,1.693) 67.914,0.8 ; R61.2@67.34,-0.143 cw(c68.231,-0.143) R61.2@67.601,0.487 ; R61.2@67.594,-0.143 cw(c69.098,-0.143) 68.035,0.921 ; U15.4@75.57,0.554 ccw(c75.274,0.85) 75.692,0.85 ccw(c76.11,0.85) U15.4@75.814,0.554
NetR62_2: R62.2 U15.6 | length 13.5
  Top Layer w0.254: U15.6@78.11,0.554 ccw(c77.814,0.85) 78.232,0.85 ccw(c78.65,0.85) U15.6@78.354,0.554 ; U15.6@78.232,-0.368 78.232,1.143 78.74,1.651 83.931,1.651 R62.2@85.725,-0.143 ; 84.661,0.921 cw(c83.598,-0.143) R62.2@85.102,-0.143 ; 84.782,0.8 ccw(c85.675,1.693) R62.2@85.675,0.43 ; R62.2@85.095,0.487 cw(c84.465,-0.143) R62.2@85.356,-0.143
NetR63_2: R63.2 U15.8 | length 6.9
  Top Layer w0.254: U15.8@80.772,-0.368 80.772,0.508 81.153,0.889 81.899,0.889 ; U15.8@80.945,0.432 cw(c81.546,0.432) 81.121,0.857 ; 81.988,0.8 ccw(c82.881,1.693) R63.2@82.881,0.43 ; R63.2@82.308,-0.13 ccw(c80.911,-0.099) 81.899,0.889 ; R63.2@82.319,0.469 cw(c81.733,-0.118) R63.2@82.562,-0.136 ; R63.2@82.931,-0.143 81.899,0.889
NetR64_2: R64.2 U16.2 | length 9.1
  Top Layer w0.254: R64.2@91.313,-0.143 92.599,1.143 94.742,1.143 94.996,0.889 U16.2@94.996,-0.368 ; R64.2@91.363,0.43 ccw(c91.363,1.693) 92.256,0.8 ; R64.2@91.682,-0.143 cw(c92.573,-0.143) R64.2@91.943,0.487 ; R64.2@91.936,-0.143 cw(c93.44,-0.143) 92.377,0.921 ; U16.2@94.874,0.554 ccw(c94.578,0.85) 94.996,0.85 ccw(c95.414,0.85) U16.2@95.118,0.554
NetR65_2: R65.2 U16.4 | length 15
  Top Layer w0.254: R65.2@88.519,-0.143 90.313,1.651 97.047,1.651 97.536,1.162 U16.4@97.536,-0.368 ; R65.2@88.569,0.43 ccw(c88.569,1.693) 89.462,0.8 ; R65.2@88.888,-0.143 cw(c89.779,-0.143) R65.2@89.149,0.487 ; R65.2@89.142,-0.143 cw(c90.646,-0.143) 89.583,0.921 ; U16.4@97.414,0.554 ccw(c97.118,0.85) 97.536,0.85 ccw(c97.954,0.85) U16.4@97.658,0.554
NetR66_2: R66.2 U16.6 | length 13.6
  Top Layer w0.254: U16.6@99.954,0.554 ccw(c99.658,0.85) 100.076,0.85 ccw(c100.494,0.85) U16.6@100.198,0.554 ; U16.6@100.076,-0.368 100.076,1.143 100.457,1.524 106.156,1.524 R66.2@107.823,-0.143 ; 106.759,0.921 cw(c105.696,-0.143) R66.2@107.2,-0.143 ; 106.88,0.8 ccw(c107.773,1.693) R66.2@107.773,0.43 ; R66.2@107.193,0.487 cw(c106.563,-0.143) R66.2@107.454,-0.143
NetR67_2: R67.2 U16.8 | length 7.2
  Top Layer w0.254: U16.8@102.616,-0.368 102.616,0.508 102.997,0.889 103.886,0.889 104.918,-0.143 R67.2@105.029,-0.143 ; U16.8@102.789,0.432 cw(c103.39,0.432) 102.965,0.857 ; 103.897,0.878 ccw(c104.979,1.961) R67.2@104.979,0.43 ; 104.044,0.731 cw(c103.17,-0.143) R67.2@104.406,-0.143 ; R67.2@104.33,0.445 ccw(c104.979,1.093) R67.2@104.979,0.176
NetR70_2: R70.2 U10.9 U11.12 | length 20.6
  Top Layer w0.254: U11.12@87.614,-17.76 ccw(c87.319,-17.464) 87.737,-17.464 ccw(c88.154,-17.464) U11.12@87.859,-17.76 ; U11.12@87.737,-18.682 87.737,-16.784 88.138,-16.383 92.202,-16.383 R70.2@92.583,-16.002 90.678,-14.097 U10.9@89.529,-14.097 ; U10.9@90.329,-14.32 cw(c90.329,-15.701) 91.305,-14.724 ; U10.9@90.329,-14.066 cw(c90.329,-14.834) 90.872,-14.291 ; 90.401,-16.383 ccw(c90.401,-13.87) R70.2@92.178,-15.647 ; 91.014,-16.383 ccw(c91.014,-14.483) R70.2@92.357,-15.826 ; 91.519,-14.938 ccw(c92.583,-13.875) R70.2@92.583,-15.379 ; 91.627,-16.383 ccw(c91.627,-15.096) R70.2@92.537,-16.006 ; 91.64,-15.059 cw(c90.747,-15.952) R70.2@92.01,-15.952 ; R70.2@91.953,-15.372 ccw(c92.583,-14.742) R70.2@92.583,-15.633
NetR71_1: R71.1 R73.2 U10.14 | length 11.2
  Top Layer w0.254: U10.14@89.529,-7.747 90.916,-7.747 91.361,-7.302 91.361,-4.953 ; R71.1@90.138,-4.953 91.361,-4.953 ; U10.14@90.487,-7.905 cw(c90.867,-8.285) 90.867,-7.747 cw(c90.867,-7.209) U10.14@90.487,-7.589 ; R71.1@90.578,-5.32 cw(c91.36,-5.97) 91.36,-4.953 ; R71.1@90.578,-4.586 ccw(c91.36,-3.936) 91.36,-4.953 ; R73.2@92.143,-5.32 ccw(c91.361,-5.97) 91.361,-4.953 ; R73.2@92.143,-4.586 cw(c91.361,-3.936) 91.361,-4.953 ; R73.2@92.583,-4.953 91.361,-4.953
NetR72_1: R72.1 R74.2 U11.5 | length 16.2
  Top Layer w0.254: U11.5@87.614,-24.404 cw(c87.319,-24.7) 87.737,-24.7 cw(c88.154,-24.7) U11.5@87.859,-24.404 ; U11.5@87.737,-23.482 87.737,-24.977 R74.2@88.938,-26.178 R72.1@91.67,-26.178 ; 87.874,-25.114 cw(c86.811,-26.178) R74.2@88.315,-26.178 ; 87.995,-25.235 ccw(c88.888,-24.342) R74.2@88.888,-25.605 ; R74.2@88.308,-25.548 cw(c87.678,-26.178) R74.2@88.569,-26.178 ; R74.2@89.213,-26.404 cw(c89.758,-26.948) 89.758,-26.178 cw(c89.758,-25.408) R74.2@89.213,-25.952 ; R74.2@89.393,-26.583 cw(c90.371,-27.561) 90.371,-26.178 cw(c90.371,-24.795) R74.2@89.393,-25.773 ; R72.1@91.215,-26.583 ccw(c90.237,-27.561) 90.237,-26.178 ccw(c90.237,-24.795) R72.1@91.215,-25.773 ; R72.1@91.395,-26.404 ccw(c90.85,-26.948) 90.85,-26.178 ccw(c90.85,-25.408) R72.1@91.395,-25.952
NetR75_2: R75.2 U10.11 U11.10 | length 20.5
  Top Layer w0.254: U10.11@89.529,-11.557 90.9,-11.557 R75.2@92.583,-13.24 92.075,-13.748 v1(92.075,-14.351) ; U11.10@90.154,-17.76 ccw(c89.809,-17.415) v1@90.297,-17.415 ; v1@90.175,-17.267 cw(c89.879,-17.563) 90.297,-17.563 cw(c90.715,-17.563) v1@90.419,-17.267 ; v1@90.182,-17.275 cw(c90.007,-17.473) 90.263,-17.542 ; U11.10@90.277,-18.682 90.297,-18.662 v1(90.297,-17.145) ; 90.297,-17.514 ccw(c90.645,-17.514) U11.10@90.399,-17.76 ; U10.11@90.487,-11.715 cw(c90.867,-12.095) 90.867,-11.557 cw(c90.867,-11.019) U10.11@90.487,-11.399 ; 91.519,-12.176 ccw(c92.583,-11.113) R75.2@92.583,-12.617 ; 91.64,-12.297 cw(c90.747,-13.19) R75.2@92.01,-13.19 ; v1@91.953,-14.229 ccw(c91.657,-13.933) 92.075,-13.933 ccw(c92.493,-13.933) v1@92.197,-14.229 ; R75.2@91.953,-12.61 ccw(c92.583,-11.98) R75.2@92.583,-12.871 ; v1@91.989,-14.201 ccw(c91.851,-13.963) 92.117,-14.034 ; v1@92.075,-14.466 cw(c92.683,-14.466) R75.2@92.631,-13.861 ; v1@92.075,-14.19 cw(c92.659,-14.19) R75.2@92.61,-13.608 ; R75.2@92.075,-13.913 cw(c92.636,-13.913) R75.2@92.588,-13.355 ; R75.2@92.135,-13.967 ccw(c92.406,-14.04) v1@92.201,-14.233
  Bottom Layer w0.254: v1(90.297,-17.145) 92.075,-15.367 v1(92.075,-14.351) ; v1@90.297,-16.972 ccw(c90.297,-16.554) 90.592,-16.85 ccw(c90.888,-17.145) v1@90.47,-17.145 ; v1@91.953,-14.473 cw(c91.657,-14.769) 92.075,-14.769 cw(c92.493,-14.769) v1@92.197,-14.473
NetR76_1: R76.1 R78.1 U10.13 | length 11.9
  Top Layer w0.254: U10.13@89.529,-9.017 92.583,-9.017 ; U10.13@90.487,-9.175 cw(c90.867,-9.555) 90.867,-9.017 cw(c90.867,-8.479) U10.13@90.487,-8.859 ; R76.1@92.178,-10.022 ccw(c91.2,-9.044) 92.583,-9.044 ccw(c93.966,-9.044) R76.1@92.988,-10.022 ; R78.1@92.209,-8.199 cw(c91.502,-9.017) 92.583,-9.017 ; R76.1@92.357,-10.202 ccw(c91.813,-9.657) 92.583,-9.657 ccw(c93.353,-9.657) R76.1@92.809,-10.202 ; R76.1@92.583,-10.477 92.583,-9.017 ; R78.1@92.583,-7.715 92.583,-9.017 ; R78.1@92.957,-8.199 ccw(c93.664,-9.017) 92.583,-9.017
NetR77_1: R77.1 R79.2 U11.7 | length 18.9
  Top Layer w0.254: U11.7@90.277,-23.482 90.277,-24.491 90.805,-25.019 93.244,-25.019 R79.2@94.403,-26.178 R77.1@97.136,-26.178 ; U11.7@90.45,-24.282 ccw(c91.371,-24.282) 90.719,-24.933 ; 93.34,-25.114 cw(c92.276,-26.178) R79.2@93.78,-26.178 ; 93.46,-25.235 ccw(c94.353,-24.342) R79.2@94.353,-25.605 ; R79.2@93.773,-25.548 cw(c93.143,-26.178) R79.2@94.034,-26.178 ; R79.2@94.679,-26.404 cw(c95.223,-26.948) 95.223,-26.178 cw(c95.223,-25.408) R79.2@94.679,-25.952 ; R79.2@94.858,-26.583 cw(c95.837,-27.561) 95.837,-26.178 cw(c95.837,-24.795) R79.2@94.858,-25.773 ; R77.1@96.681,-26.583 ccw(c95.703,-27.561) 95.703,-26.178 ccw(c95.703,-24.795) R77.1@96.681,-25.773 ; R77.1@96.861,-26.404 ccw(c96.316,-26.948) 96.316,-26.178 ccw(c96.316,-25.408) R77.1@96.861,-25.952
NetR80_2: R80.2 U12.7 U13.16 | length 11.6
  Top Layer w0.254: R80.2@99.282,-16.002 99.917,-15.367 100.711,-15.367 ; R80.2@99.346,-15.965 cw(c100.084,-16.122) 100.084,-15.367 ; R80.2@99.594,-16.018 cw(c100.398,-16.188) 100.398,-15.367 ; R80.2@99.843,-16.071 cw(c100.711,-16.255) 100.711,-15.367 ; U13.16@100.568,-17.76 ccw(c100.273,-17.464) 100.691,-17.464 ccw(c101.108,-17.464) U13.16@100.813,-17.76 ; U13.16@100.691,-18.682 100.691,-15.387 100.711,-15.367 ; U12.7@101.505,-15.525 ccw(c101.125,-15.905) 101.125,-15.367 ccw(c101.125,-14.829) U12.7@101.505,-15.209 ; U12.7@102.463,-15.367 100.711,-15.367
NetR81_1: R81.1 R83.2 U12.1 | length 11.3
  Top Layer w0.254: R81.1@99.282,-4.953 100.505,-4.953 ; R81.1@99.722,-5.32 cw(c100.504,-5.97) 100.504,-4.953 ; R81.1@99.722,-4.586 ccw(c100.504,-3.936) 100.504,-4.953 ; R83.2@101.287,-5.32 ccw(c100.505,-5.97) 100.505,-4.953 ; R83.2@101.287,-4.586 cw(c100.505,-3.936) 100.505,-4.953 ; U12.1@101.505,-7.905 ccw(c101.125,-8.285) 101.125,-7.747 ccw(c101.125,-7.209) U12.1@101.505,-7.589 ; R83.2@101.727,-4.953 100.505,-4.953 ; U12.1@102.463,-7.747 101.076,-7.747 100.505,-7.175 100.505,-4.953
NetR82_1: R82.1 R84.2 U13.1 | length 22.9
  Top Layer w0.254: R84.2@99.574,-25.72 ccw(c97.889,-23.482) 100.691,-23.482 100.691,-26.158 100.711,-26.178 ; R84.2@99.727,-25.923 ccw(c98.272,-23.991) U13.1@100.691,-23.991 ; R84.2@99.88,-26.126 ccw(c98.656,-24.501) U13.1@100.691,-24.501 ; R84.2@100.033,-26.329 ccw(c99.039,-25.01) 100.691,-25.01 ; R84.2@100.145,-26.404 cw(c100.689,-26.948) 100.689,-26.178 cw(c100.689,-25.408) R84.2@100.145,-25.952 ; R84.2@100.186,-26.532 ccw(c99.423,-25.519) 100.691,-25.519 ; R84.2@100.324,-26.583 cw(c101.302,-27.561) 101.302,-26.178 cw(c101.302,-24.795) R84.2@100.324,-25.773 ; R84.2@100.338,-26.735 ccw(c99.806,-26.029) 100.691,-26.029 ; R84.2@100.463,-26.357 cw(c100.711,-26.439) 100.711,-26.178 ; R84.2@100.463,-25.999 ccw(c100.711,-25.917) 100.711,-26.178 ; U13.1@100.568,-24.404 cw(c100.273,-24.7) 100.691,-24.7 cw(c101.108,-24.7) U13.1@100.813,-24.404 ; R82.1@102.147,-26.583 ccw(c101.168,-27.561) 101.168,-26.178 ccw(c101.168,-24.795) R82.1@102.147,-25.773 ; R82.1@102.326,-26.404 ccw(c101.782,-26.948) 101.782,-26.178 ccw(c101.782,-25.408) R82.1@102.326,-25.952 ; R82.1@102.602,-26.178 100.711,-26.178
NetR85_2: R85.2 U12.5 U13.14 | length 23.6
  Top Layer w0.254: R85.2@99.282,-13.863 cw(c99.282,-15.367) 100.346,-14.303 ; R85.2@99.282,-13.609 cw(c99.282,-14.5) R85.2@99.912,-13.87 ; R85.2@99.328,-13.236 cw(c100.315,-14.222) 100.315,-12.827 ; R85.2@99.508,-13.415 cw(c100.928,-14.836) 100.928,-12.827 ; R85.2@99.687,-13.595 cw(c101.541,-15.449) U12.5@101.541,-12.827 ; R85.2@99.855,-13.29 ccw(c101.118,-13.29) 100.225,-14.183 ; 100.371,-14.329 cw(c99.968,-14.732) v1@100.538,-14.732 ; 100.524,-14.481 ccw(c100.711,-14.294) v1@100.711,-14.559 ; v1(100.711,-14.732) 100.711,-14.669 R85.2@99.282,-13.24 99.695,-12.827 U12.5@102.463,-12.827 ; U12.5@101.505,-12.985 ccw(c101.125,-13.365) 101.125,-12.827 ccw(c101.125,-12.289) U12.5@101.505,-12.669 ; v1@102.875,-17.14 cw(c101.966,-18.049) U13.14@103.251,-18.049 ; v1(102.997,-17.018) 103.251,-17.272 ; v1@103.016,-17.19 cw(c103.048,-17.474) 103.251,-17.272 ; v1@103.054,-16.961 cw(c102.579,-17.436) 103.251,-17.436 ; U13.14@103.108,-17.76 ccw(c102.763,-17.415) 103.251,-17.415 ; v1@103.169,-17.037 ccw(c103.453,-17.069) 103.251,-17.272 ; U13.14@103.231,-18.682 103.251,-18.662 103.251,-17.272 ; 103.251,-17.514 ccw(c103.599,-17.514) U13.14@103.353,-17.76
  Bottom Layer w0.254: v1@100.711,-14.905 cw(c100.711,-15.323) 101.006,-15.027 cw(c101.302,-14.732) v1@100.884,-14.732 ; v1(100.711,-14.732) v1(102.997,-17.018) ; v1@102.824,-17.018 ccw(c102.406,-17.018) 102.702,-16.723 ccw(c102.997,-16.427) v1@102.997,-16.845
NetR86_1: R86.1 R88.1 U12.2 | length 12
  Top Layer w0.254: R88.1@98.877,-10.022 ccw(c97.899,-9.044) 99.282,-9.044 ccw(c100.665,-9.044) R88.1@99.687,-10.022 ; R86.1@98.908,-8.199 cw(c98.201,-9.017) 99.282,-9.017 ; R88.1@99.056,-10.202 ccw(c98.512,-9.657) 99.282,-9.657 ccw(c100.052,-9.657) R88.1@99.508,-10.202 ; R88.1@99.282,-10.477 99.282,-9.017 ; R86.1@99.282,-7.715 99.282,-9.017 ; R86.1@99.656,-8.199 ccw(c100.363,-9.017) 99.282,-9.017 ; U12.2@101.505,-9.175 ccw(c101.125,-9.555) 101.125,-9.017 ccw(c101.125,-8.479) U12.2@101.505,-8.859 ; U12.2@102.463,-9.017 99.282,-9.017
NetR87_1: R87.1 R89.2 U13.3 | length 16.7
  Top Layer w0.254: U13.3@103.231,-24.455 cw(c103.231,-25.375) 103.881,-24.725 ; U13.3@103.231,-23.482 103.231,-24.074 R89.2@105.335,-26.178 R87.1@108.068,-26.178 ; 104.271,-25.114 cw(c103.208,-26.178) R89.2@104.712,-26.178 ; 104.392,-25.235 ccw(c105.285,-24.342) R89.2@105.285,-25.605 ; R89.2@104.705,-25.548 cw(c104.075,-26.178) R89.2@104.966,-26.178 ; R89.2@105.61,-26.404 cw(c106.155,-26.948) 106.155,-26.178 cw(c106.155,-25.408) R89.2@105.61,-25.952 ; R89.2@105.79,-26.583 cw(c106.768,-27.561) 106.768,-26.178 cw(c106.768,-24.795) R89.2@105.79,-25.773 ; R87.1@107.612,-26.583 ccw(c106.634,-27.561) 106.634,-26.178 ccw(c106.634,-24.795) R87.1@107.612,-25.773 ; R87.1@107.792,-26.404 ccw(c107.247,-26.948) 107.247,-26.178 ccw(c107.247,-25.408) R87.1@107.792,-25.952
NetR90_2: R90.2 U12.9 U13.12 | length 20.3
  Top Layer w0.254: U13.12@105.648,-17.76 ccw(c105.353,-17.464) 105.771,-17.464 ccw(c106.188,-17.464) U13.12@105.893,-17.76 ; U13.12@105.771,-18.682 105.771,-17.292 106.68,-16.383 110.236,-16.383 R90.2@110.617,-16.002 108.712,-14.097 U12.9@107.563,-14.097 ; U12.9@108.363,-14.32 cw(c108.363,-15.701) 109.339,-14.724 ; U12.9@108.363,-14.066 cw(c108.363,-14.834) 108.906,-14.291 ; 108.435,-16.383 ccw(c108.435,-13.87) R90.2@110.212,-15.647 ; 109.048,-16.383 ccw(c109.048,-14.483) R90.2@110.391,-15.826 ; 109.553,-14.938 ccw(c110.617,-13.875) R90.2@110.617,-15.379 ; 109.661,-16.383 ccw(c109.661,-15.096) R90.2@110.571,-16.006 ; 109.674,-15.059 cw(c108.781,-15.952) R90.2@110.044,-15.952 ; R90.2@109.987,-15.372 ccw(c110.617,-14.742) R90.2@110.617,-15.633
NetR91_1: R91.1 R93.2 U12.14 | length 10.9
  Top Layer w0.254: U12.14@107.563,-7.747 108.315,-7.747 109.395,-6.667 109.395,-4.953 ; R91.1@108.172,-4.953 109.395,-4.953 ; U12.14@108.363,-7.524 ccw(c108.363,-7.102) 108.662,-7.4 ; U12.14@108.586,-7.747 cw(c109.24,-7.747) 108.778,-7.284 ; R91.1@108.612,-5.32 cw(c109.394,-5.97) 109.394,-4.953 ; R91.1@108.612,-4.586 ccw(c109.394,-3.936) 109.394,-4.953 ; R93.2@110.177,-5.32 ccw(c109.395,-5.97) 109.395,-4.953 ; R93.2@110.177,-4.586 cw(c109.395,-3.936) 109.395,-4.953 ; R93.2@110.617,-4.953 109.395,-4.953
NetR92_1: R92.1 R94.2 U13.5 | length 22
  Top Layer w0.254: U13.5@105.771,-24.455 cw(c105.771,-24.982) 106.143,-24.61 ; U13.5@105.791,-24.257 106.68,-25.146 108.966,-25.146 ; U13.5@105.944,-24.282 ccw(c106.251,-24.282) 106.034,-24.5 ; 109.29,-25.47 ccw(c110.342,-24.417) R94.2@110.678,-25.867 ; 109.613,-25.793 ccw(c110.464,-24.943) R94.2@110.736,-26.115 ; 109.937,-26.117 ccw(c110.586,-25.468) R94.2@110.793,-26.362 ; R94.2@110.198,-26.33 ccw(c109.998,-26.385) 109.998,-26.178 ; R94.2@110.198,-26.026 cw(c109.998,-25.971) 109.998,-26.178 ; R94.2@110.621,-25.62 cw(c110.22,-23.892) 108.966,-25.146 ; R94.2@111.076,-26.404 cw(c111.621,-26.948) 111.621,-26.178 cw(c111.621,-25.408) R94.2@111.076,-25.952 ; R94.2@111.256,-26.583 cw(c112.234,-27.561) 112.234,-26.178 cw(c112.234,-24.795) R94.2@111.256,-25.773 ; R92.1@113.078,-26.583 ccw(c112.1,-27.561) 112.1,-26.178 ccw(c112.1,-24.795) R92.1@113.078,-25.773 ; R92.1@113.258,-26.404 ccw(c112.713,-26.948) 112.713,-26.178 ccw(c112.713,-25.408) R92.1@113.258,-25.952 ; R92.1@113.533,-26.178 R94.2@110.8,-26.178 109.998,-26.178 ; 108.966,-25.146 109.998,-26.178
NetR95_2: R95.2 U12.11 U13.10 | length 20.9
  Top Layer w0.254: U12.11@107.563,-11.557 108.934,-11.557 R95.2@110.617,-13.24 109.982,-13.875 v1(109.982,-14.478) ; U13.10@108.188,-17.76 ccw(c107.843,-17.415) 108.331,-17.415 ; v1@108.209,-17.14 cw(c107.913,-17.436) 108.331,-17.436 cw(c108.749,-17.436) v1@108.453,-17.14 ; U13.10@108.311,-18.682 108.331,-18.662 v1(108.331,-17.018) ; 108.331,-17.514 ccw(c108.679,-17.514) U13.10@108.433,-17.76 ; U12.11@108.521,-11.715 cw(c108.901,-12.095) 108.901,-11.557 cw(c108.901,-11.019) U12.11@108.521,-11.399 ; 109.553,-12.176 ccw(c110.617,-11.113) R95.2@110.617,-12.617 ; 109.674,-12.297 cw(c108.781,-13.19) R95.2@110.044,-13.19 ; v1@109.86,-14.356 ccw(c109.564,-14.06) 109.982,-14.06 ccw(c110.4,-14.06) v1@110.104,-14.356 ; v1@109.896,-14.328 ccw(c109.742,-14.062) 110.039,-14.141 ; v1@109.982,-14.354 cw(c110.733,-14.354) R95.2@110.652,-13.607 ; 109.982,-14.07 cw(c110.702,-14.07) R95.2@110.624,-13.354 ; R95.2@109.982,-13.787 cw(c110.671,-13.787) R95.2@110.596,-13.102 ; R95.2@109.987,-12.61 ccw(c110.617,-11.98) R95.2@110.617,-12.871 ; 110.068,-14.032 ccw(c110.484,-14.143) v1@110.126,-14.382
  Bottom Layer w0.254: v1(108.331,-17.018) 109.982,-15.367 v1(109.982,-14.478) ; v1@108.331,-16.845 ccw(c108.331,-16.427) 108.626,-16.723 ccw(c108.922,-17.018) v1@108.504,-17.018 ; v1@109.86,-14.6 cw(c109.564,-14.896) 109.982,-14.896 cw(c110.4,-14.896) v1@110.104,-14.6
NetR96_1: R96.1 R98.1 U12.13 | length 13.4
  Top Layer w0.254: U12.13@107.563,-9.017 110.601,-9.017 110.617,-9.001 ; U12.13@108.521,-9.175 cw(c108.901,-9.555) 108.901,-9.017 cw(c108.901,-8.479) U12.13@108.521,-8.859 ; R96.1@110.212,-10.022 ccw(c109.234,-9.044) 110.617,-9.044 ccw(c112,-9.044) R96.1@111.022,-10.022 ; R98.1@110.212,-8.17 cw(c109.234,-9.149) 110.617,-9.149 cw(c112,-9.149) R98.1@111.022,-8.17 ; R96.1@110.391,-10.202 ccw(c109.847,-9.657) 110.617,-9.657 ccw(c111.387,-9.657) R96.1@110.843,-10.202 ; R98.1@110.391,-7.991 cw(c109.847,-8.535) 110.617,-8.535 cw(c111.387,-8.535) R98.1@110.843,-7.991 ; R96.1@110.617,-10.477 R98.1@110.617,-7.715
NetR97_1: R97.1 R99.2 U13.7 | length 25.8
  Top Layer w0.254: U13.7@108.311,-24.037 U13.7@108.311,-23.482 108.311,-22.626 108.966,-21.971 111.125,-21.971 111.379,-22.225 111.379,-24.638 111.65,-24.909 114.997,-24.909 R99.2@116.266,-26.178 R97.1@118.999,-26.178 ; U13.7@108.311,-22.509 ccw(c108.311,-22.225) 108.511,-22.426 ; U13.7@108.484,-22.682 cw(c109.035,-22.682) 108.645,-22.292 ; 115.203,-25.114 cw(c114.139,-26.178) R99.2@115.643,-26.178 ; 115.323,-25.235 ccw(c116.216,-24.342) R99.2@116.216,-25.605 ; R99.2@115.636,-25.548 cw(c115.006,-26.178) R99.2@115.897,-26.178 ; R99.2@116.542,-26.404 cw(c117.086,-26.948) 117.086,-26.178 cw(c117.086,-25.408) R99.2@116.542,-25.952 ; R99.2@116.721,-26.583 cw(c117.699,-27.561) 117.699,-26.178 cw(c117.699,-24.795) R99.2@116.721,-25.773 ; R97.1@118.544,-26.583 ccw(c117.566,-27.561) 117.566,-26.178 ccw(c117.566,-24.795) R97.1@118.544,-25.773 ; R97.1@118.723,-26.404 ccw(c118.179,-26.948) 118.179,-26.178 ccw(c118.179,-25.408) R97.1@118.723,-25.952
NetR103_1: R103.1 U34.2 | length 15.2
  Bottom Layer w0.254: R103.1@51.689,-12.557 R103.1@52.07,-12.557 53.364,-13.851 55.955,-13.851 56.455,-14.351 58.547,-14.351 ; R103.1@52.12,-13.13 cw(c52.12,-14.393) 53.013,-13.5 ; R103.1@52.439,-12.557 ccw(c53.33,-12.557) R103.1@52.7,-13.187 ; R103.1@52.693,-12.557 ccw(c54.197,-12.557) 53.134,-13.621 ; 58.964,-14.768 cw(c58.046,-15.687) U34.2@59.344,-15.723 ; U34.2@59.09,-15.716 ccw(c57.234,-15.664) 58.547,-14.351 ; U34.2@59.563,-16.129 59.563,-15.367 58.547,-14.351
NetR104_1: R104.1 U34.3 | length 11.8
  Bottom Layer w0.254: R104.1@57.658,-12.557 59.039,-12.557 ; R104.1@57.94,-12.776 cw(c58.449,-13.258) 58.449,-12.557 cw(c58.449,-11.856) R104.1@57.94,-12.338 ; R104.1@58.124,-12.951 cw(c59.039,-13.816) 59.039,-12.557 ; R104.1@58.124,-12.163 ccw(c59.039,-11.298) 59.039,-12.557 ; 61.219,-14.737 cw(c60.227,-15.729) U34.3@61.63,-15.729 ; 61.48,-14.998 ccw(c62.103,-14.375) U34.3@62.103,-15.256 ; 61.653,-15.171 cw(c61.095,-15.729) U34.3@61.884,-15.729 ; U34.3@62.103,-16.129 62.103,-15.621 59.039,-12.557
NetR105_2: R105.2 U6.36 | length 11.4
  Top Layer w0.254: v1@19.939,-8.936 cw(c19.939,-9.354) 20.234,-9.058 cw(c20.53,-8.763) v1@20.112,-8.763 ; v1(19.939,-8.763) 20.828,-9.652 22.352,-9.652 22.523,-9.823 U6.36@22.523,-11.088
  Bottom Layer w0.254: R105.2@17.637,-9.664 ccw(c17.637,-8.467) 18.484,-9.313 ; R105.2@17.637,-9.41 ccw(c17.637,-7.599) 18.917,-8.88 ; R105.2@17.764,-10.033 19.034,-8.763 v1(19.939,-8.763) ; R105.2@18.21,-9.983 cw(c19.166,-9.983) 18.49,-9.307 ; v1@19.817,-8.885 ccw(c19.521,-9.181) 19.521,-8.763 ccw(c19.521,-8.345) v1@19.817,-8.641